# Altium PCB АСТА.758723.034_V1.PcbDoc
Units mm, origin at the board's own origin, x right, y up, seen from the top; angles counter-clockwise.
Board outline 70 x 50 mm, 2 copper layers (Top Layer, Bottom Layer), stack 1.48 mm thick; 19 components, 12 nets, 79 pads, 14 vias.
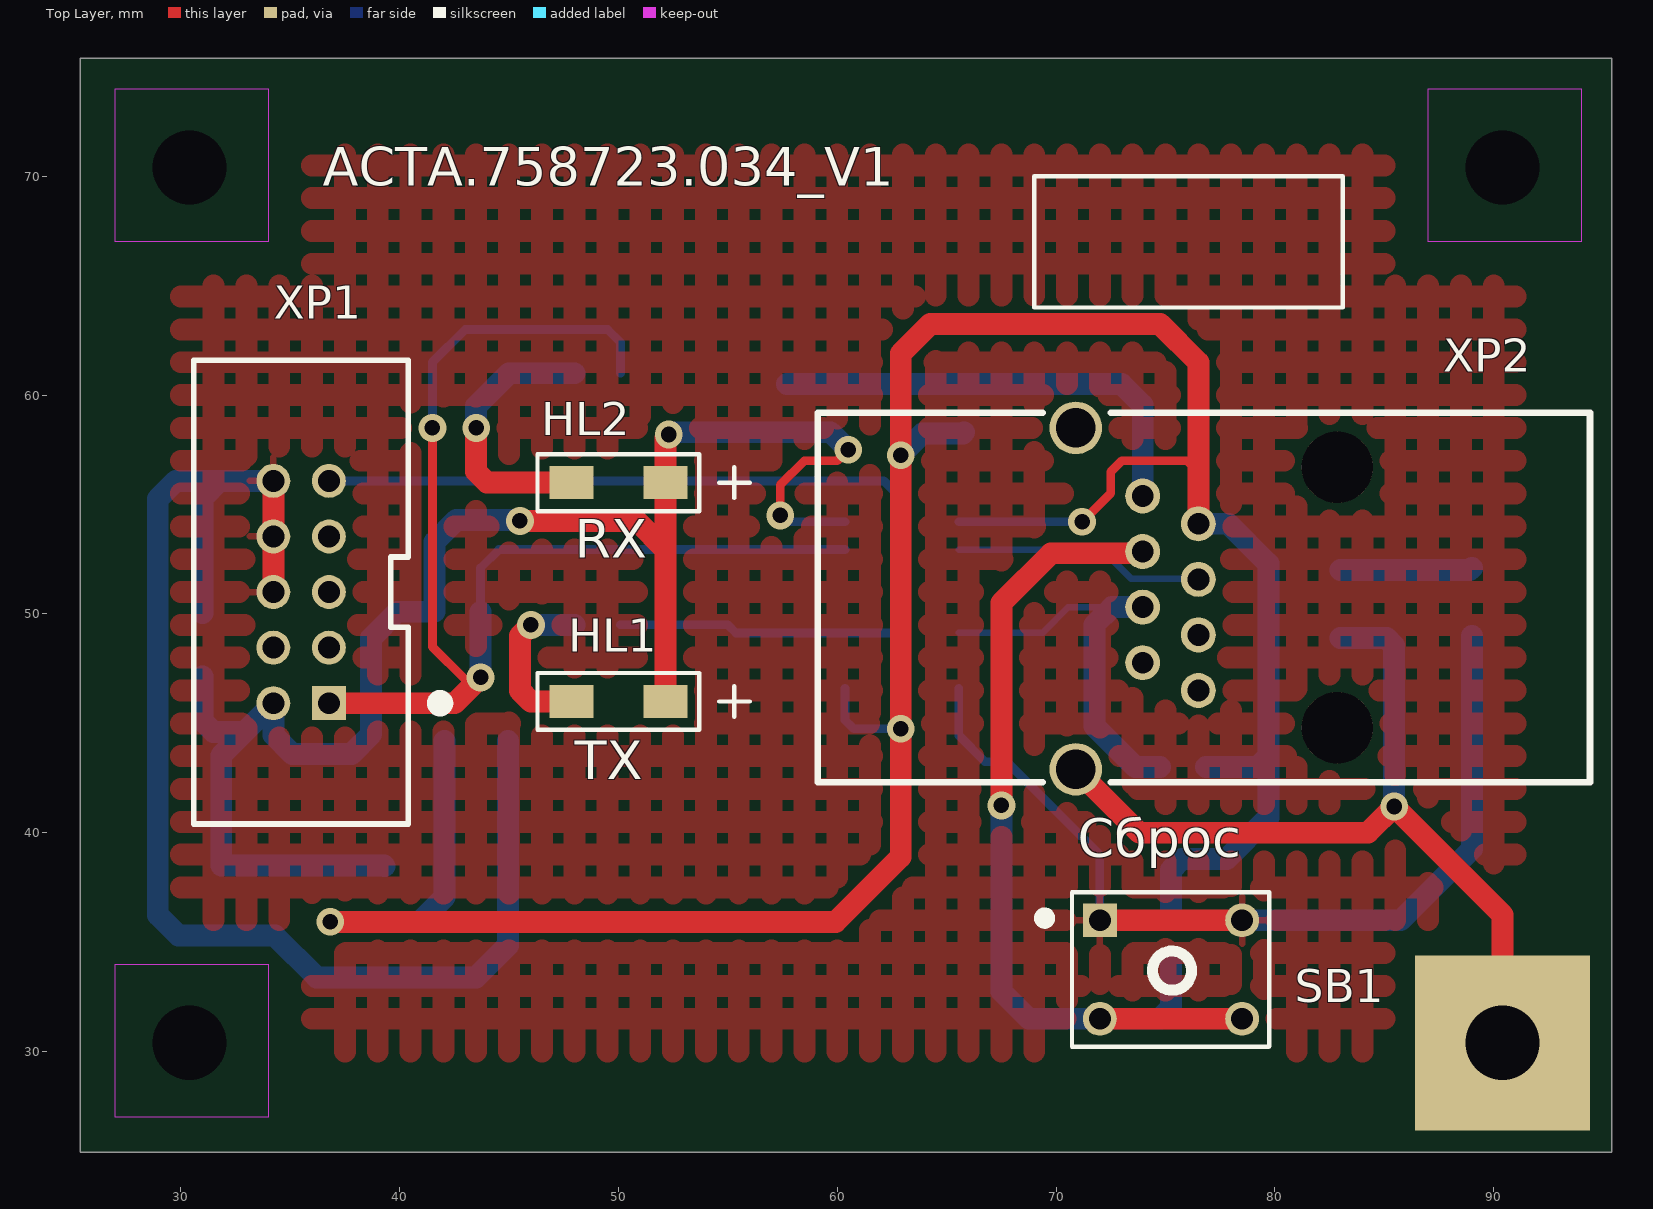
[diagram p0: Top Layer view]
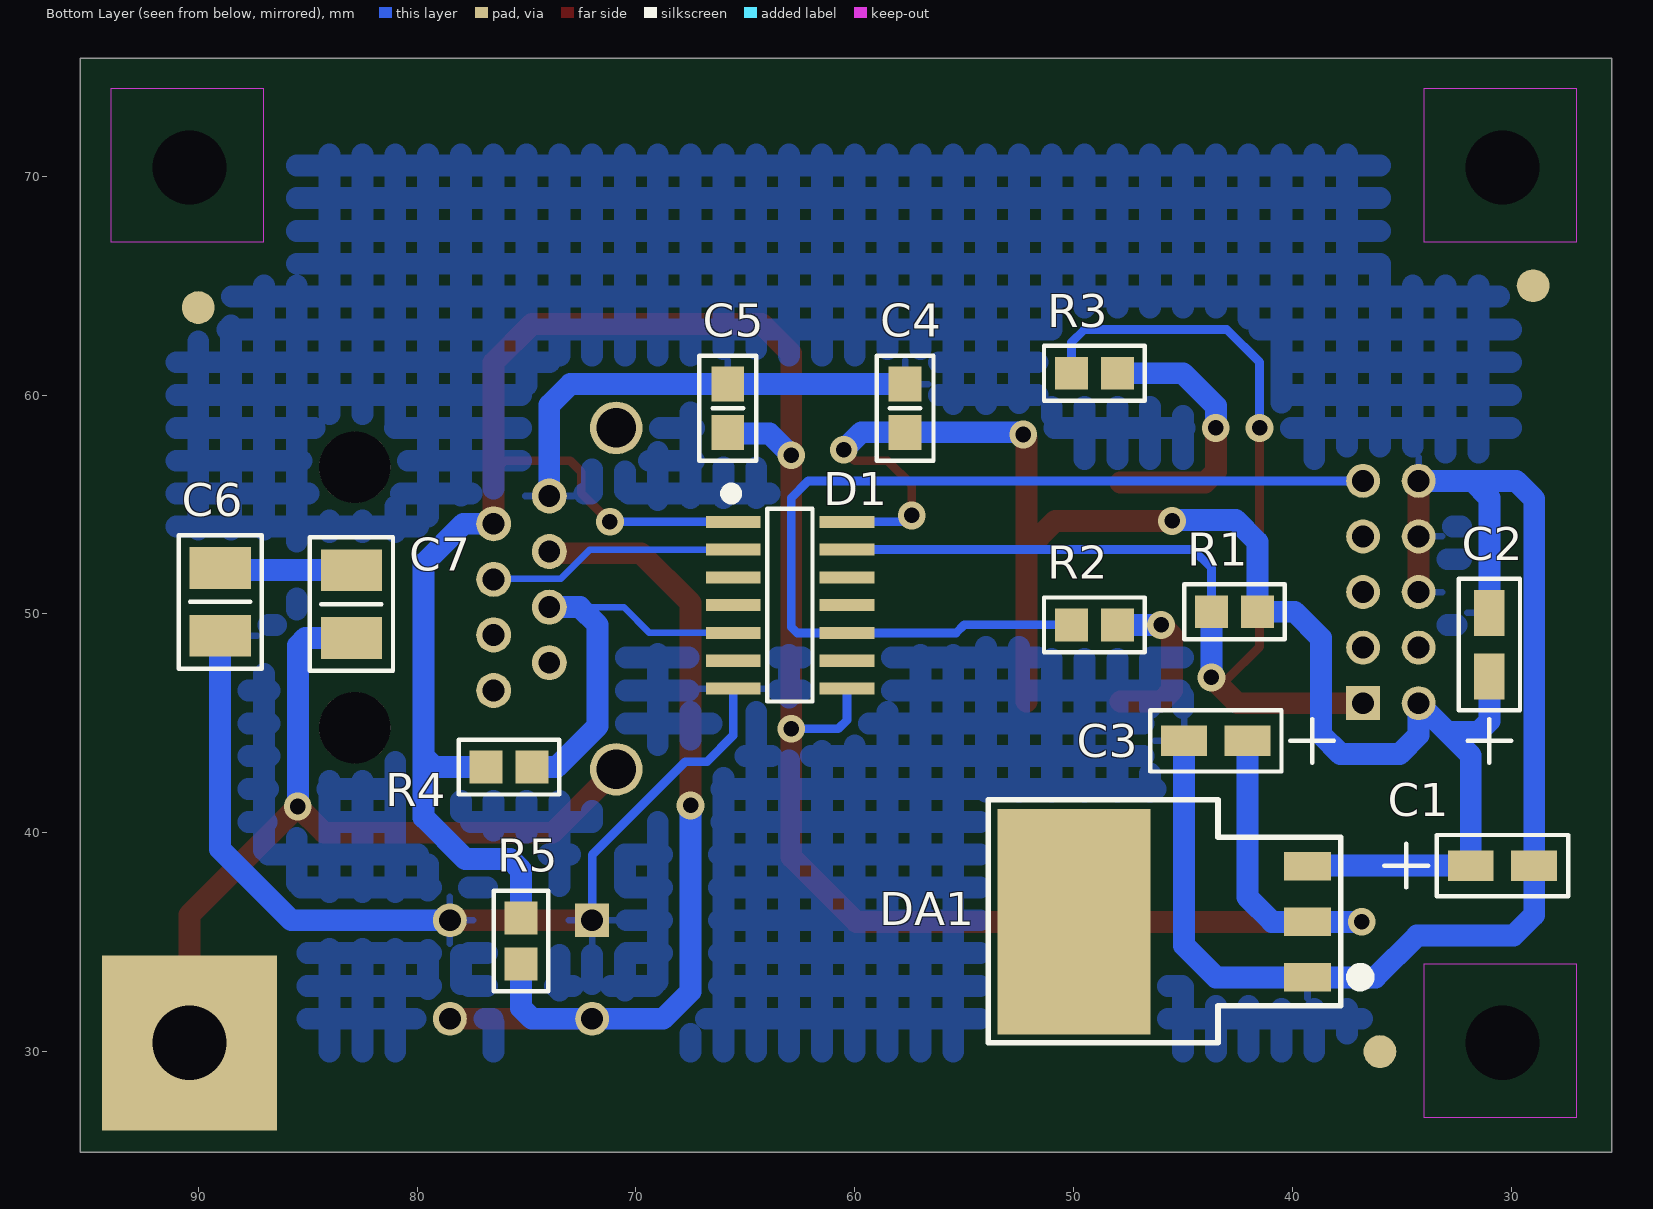
[diagram p1: Bottom Layer view, seen from below]

## Layer stack, top to bottom
Top Layer: signal copper 0.018
Dielectric: core 1.444, FR-4, Dk 4.8
Bottom Layer: signal copper 0.018

## Board outline
25.4,25.4 95.4,25.4 95.4,75.4 25.4,75.4

## Design rules (kind name [scope] priority, off if disabled: settings)
Clearance [All] p1: gap=0.3
HoleSize [All] p1: absolutevalues=TRUE maxlimit=3.4 minlimit=0.5 maxpercent=80.000 minpercent=20.000
PasteMaskExpansion [All] p1: expansion=0.075
PlaneConnect [All] p1: planeconnectstyle=Relief reliefexpansion=0.508 reliefentries=4 reliefconductorwidth=0.4 reliefairgap=0.254
PolygonConnect [All] p1: connectstyle=Relief reliefconductorwidth=0.3 reliefentries=4 polygonreliefangle="90 Angle" airgapwidth=0.3
RoutingVias [All] p1: holewidth=0.5 width=1.1 viastyle="Through Hole" minholewidth=0.5 minwidth=1.1 maxholewidth=0.5 maxwidth=1.1
SilkToSolderMaskClearance [IsPad] p1: minsilkscreentomaskgap=0.2 clearancetoexposedcopper=TRUE
SolderMaskExpansion [All] p1: expansion=0.102
Width [All] p1: maxlimit=1 minlimit=0.2 preferedwidth=0.3
24 further rules are at their usual default settings.

## Components (designator, comment, footprint, x,y, rotation, side; value= is the part's Value field where it differs from the comment)
C1 "10uF" TANTAL_A 29,38.5 r180 bottom
C2 "10uF" TANTAL_A 31,50 r90 bottom
C3 "10uF" TANTAL_A 44.9,44.2 r0 bottom
C4 "0.1uF" CAP_0805 57.7,58.3 r270 bottom
C5 "0.1uF" CAP_0805 65.8,60.5 r90 bottom
C6 "220pF" CAP_1210 89,49 r270 bottom
C7 "220pF" CAP_1210 83,52 r90 bottom
D1 "TXS0104EDR" SOIC(D)_014 63,50.4 r180 bottom
DA1 "LM1086ISX-3.3" TO-263 50,36 r180 bottom
HL1 "AP3216SYC" 1206 48,46 r0 top
HL2 "AP3216SGC" 1206 48,56 r0 top
R1 "10K" RES_0805 43.6,50.1 r0 bottom
R2 "1K" RES_0805 50,49.5 r0 bottom
R3 "1K" RES_0805 50,61 r0 bottom
R4 "10K" RES_0805 76.75,43 r0 bottom
R5 "10K" RES_0805 75.25,36 r90 bottom
SB1 "06_43" DIP_SWICH_0643 72,36 r0 top
XP1 "BH-10G" BH-10G 35.5,51 r270 top
XP2 "XP1002000-04R" XP1002000-04R 76.5,46.5 r180 top

## Footprints (in the part's own frame and the unit in brackets; to place one, negate y for a bottom-side part, rotate by r counter-clockwise, add the part's x,y. Pads: shape width x height; smd on the part's side, far side on the other; paste and mask are expansions set on the pad)
1206 [mm]
  rect 2x1.5 smd: 1(-0.15,0) 2(4.15,0)
  silkscreen extent -1.7,-1.3 8,1.3
BH-10G [mm]
  rect 1.55x1.55 hole 1: 1(5.08,1.27)
  round 1.55 hole 1: 2(5.08,-1.27) 3(2.54,1.27) 4(2.54,-1.27) 5(0,1.27) 6(0,-1.27) 7(-2.54,1.27) 8(-2.54,-1.27) 9(-5.08,1.27) 10(-5.08,-1.27)
  silkscreen extent -10.6,-4.9 10.6,6.6
CAP_0805 [mm] "Chip Resistor, Body 2.0x1.2mm, IPC Low Density"
  rect 1.6x1.5 smd: 1(0,0) 2(-2.2,0)
  silkscreen extent -3.5,-1.3 1.3,1.3
CAP_1210 [mm] "Chip Capacitor, Body 3.2x2.5mm, IPC High Density"
  rect 1.9x2.8 smd: 1(0,0) 2(-3.1,0)
  silkscreen extent -4.6,-1.9 1.5,1.9
DIP_SWICH_0643 [mm]
  rect 1.55x1.55 hole 1: 1(0,0)
  round 1.55 hole 1: 2(0,-4.5) 3(6.5,0) 4(6.5,-4.5)
  silkscreen extent -2.76,-5.77 7.75,1.28
RES_0805 [mm] "Chip Resistor, Body 2.0x1.2mm, IPC Low Density"
  rect 1.5x1.5 smd: 1(0.1,0) 2(-2,0)
  silkscreen extent -3.25,-1.25 1.35,1.25
SOIC(D)_014 [mm]
  rect 2.5x0.55 smd: 1(-2.55,3.81) 2(-2.55,2.54) 3(-2.55,1.27) 4(-2.55,0) 5(-2.55,-1.27) 6(-2.55,-2.54) 7(-2.55,-3.81) 8(2.65,-3.81) 9(2.65,-2.54) 10(2.65,-1.27) 11(2.65,0) 12(2.65,1.27) 13(2.65,2.54) 14(2.65,3.81)
  silkscreen extent -2.9,-4.4 1.07,5.35
TANTAL_A [mm]
  rect 2.1x1.4 smd: 1(-2.85,0) 2(0.05,0)
  silkscreen extent -6.8,-1.4 1.6,1.4
TO-263 [mm]
  rect 2.16x1.3 smd: 1(10.69,-2.61) 2(10.69,-0.07) 3(10.69,2.47)
  rect 7x10.3 smd: 4(0.02,-0.07)
  silkscreen extent -3.9,-5.6 13.4,5.5
XP1002000-04R [mm]
  round 1.6 hole 1: 1(2.54,-8.89) 2(0,-7.62) 3(2.54,-6.35) 4(0,-5.08) 5(2.54,-3.81) 6(0,-2.54) 7(2.54,-1.27) 8(0,0)
  round 2.4 hole 1.8: 9(5.6,-12) 10(5.6,3.6)
  round 3.25 hole 3.25 unplated: 11(-6.35,1.7) 12(-6.35,-10.2)
  silkscreen extent -17.9,-12.7 17.4,4.2

## Part data
C1 C2 C3: library part TANTAL_A
C4 C5: library part CAP-0805
C6 C7: library part CAP-1210
D1: "Bidirectional Voltage level; 4-bit"
DA1: library part LM1086, "to + 3.3  1.5A"
HL1 HL2: library part AP3216(1206), "Светодиод планарный 1206"
R1 R2 R3 R4 R5: library part RES-0805
XP2: "Serial to Ethernet Port"

## Free pads (board coordinates)
  round 0 hole 3.4 unplated: 1(30.4,30.4) 3(90.4,70.4) 4(30.4,70.4)
  round 1.5 smd far side mask+1: 1(90,64) 2(36,30) 3(29,65)
  rect 8x8 hole 3.4: 2(90.4,30.4)

## Via types
v1: diameter 1.27, hole 0.711, Top Layer to Bottom Layer, 14 vias

## Nets (pads, with @x,y where several pads share a name; then routed paths per layer and width w, separated by ;. In a path a pad name is that pad's centre, name@x,y a point inside that pad or via, vN(x,y) a via of type N, cw(c..) or ccw(c..) an arc to the next point about the centre after c; other vN are vias at no path point)
+3.3V: C3.1 C5.2 D1.1 D1.8 DA1.2 R4.1 R5.1 XP2.2 | length 132.1
  Top Layer w0.4: v1(71.19,54.21) 72.5,55.52 72.5,56.5 73,57 76,57 76.5,56.5
  Top Layer w1: v1@36.9,36 v1(36.83,35.93) 59.93,35.93 62.9,38.9 v1(62.9,44.75) v1(62.9,57.25) 62.9,61.9 64.25,63.25 74.75,63.25 76.5,61.5 76.5,56.5 XP2.2
  Bottom Layer w0.4: D1.8 60.35,45.15 60.75,44.75 v1(62.9,44.75) ; D1.1 v1(71.19,54.21)
  Bottom Layer w1: v1(36.83,35.93) DA1.2 40.93,35.93 42.05,37.05 C3.1 ; v1(62.9,57.25) 63.9,58.25 65.75,58.25 C5.2 ; R5.1 75.25,38.3 75.75,38.8 77.8,38.8 79.7,40.7 79.7,43.5 ; XP2.2 77.88,54.12 79.7,52.3 79.7,43.5 ; R4.1 79.2,43 79.7,43.5
+5V: C1.1 C2.1 C4.1 D1.14 DA1.3 HL1.2 HL2.2 R1.2 XP1.2 | length 78.2
  Top Layer w0.4: v1(57.4,54.5) 57.4,55.9 58.5,57 60,57 v1(60.5,57.5)
  Top Layer w1: v1(45.5,54.25) 50.84,54.25 52.15,52.94 ; HL1.2 52.15,52.94 ; v1(52.3,58.2) 52.15,58.05 HL2.2 52.15,52.94
  Bottom Layer w0.4: v1(57.4,54.5) 57.69,54.21 D1.14
  Bottom Layer w1: C2.1 31,45.1 31.5,44.6 32.91,44.6 ; DA1.3 39.28,38.5 C1.1 31.85,43.54 32.91,44.6 ; v1@45.5,54.3 42.6,54.3 41.6,53.3 R1.2 39.9,50.1 38.7,48.9 38.7,44.5 37.8,43.6 35.1,43.6 34.23,44.47 XP1.2 32.91,44.6 ; v1@52.4,58.2 52.5,58.3 C4.1 59.7,58.3 v1(60.5,57.5)
EARTH: C7.2 pad.2@90.4,30.4 XP2.10 | length 39
  Top Layer w1: XP2.10 73.8,40 84.25,40 v1(85.45,41.2) 90.4,36.25 pad.2@90.4,30.4
  Bottom Layer w1: C7.2 85.1,48.9 85.45,48.55 v1(85.45,41.2)
GND: C1.2 C2.2 C3.2 C4.2 C5.1 C6.1 D1.7 DA1.1 SB1.1 SB1.3 XP1.6 XP1.8 XP1.10 XP2.1 | length 125.9
  Top Layer w1: XP1.6 XP1.8 XP1.10 ; SB1.1 SB1.3
  Bottom Layer w0.4: D1.7 65.55,44.45 66.75,43.25 67.75,43.25 72,39 SB1.1
  Bottom Layer w1: C2.2 31,55.3 31.78,56.08 ; XP1.10 31.78,56.08 ; C3.2 44.95,34.85 43.49,33.39 DA1.1 36.21,33.39 34.3,35.3 29.9,35.3 28.95,36.25 C1.2 28.95,55.25 29.78,56.08 31.78,56.08 ; C4.2 C5.1 73,60.5 73.96,59.54 XP2.1 ; SB1.3 85.75,36 89,39.25 C6.1
NetC6_2: C6.2 C7.1 | length 6
  Bottom Layer w1: C7.1 88.9,52 C6.2
NetD1_2: D1.2 XP2.4 | length 11.5
  Bottom Layer w0.3: D1.2 72.102,52.94 73.442,51.6 76.48,51.6 XP2.4
NetD1_5: D1.5 R4.2 XP2.5 | length 17.9
  Bottom Layer w0.3: D1.5 69.38,49.13 70.56,50.31 72.06,50.31
  Bottom Layer w1: XP2.5 72.56,50.31 71.75,49.5 71.75,44.878 73.628,43 R4.2
NetD1_10: D1.10 R2.1 XP1.9 | length 45.4
  Bottom Layer w0.4: XP1.9 62.12,56.08 62.9,55.3 62.9,49.4 62.63,49.13 D1.10 55.37,49.13 55,49.5 R2.1
NetD1_13: D1.13 R1.1 R3.1 XP1.1 | length 55.9
  Top Layer w0.4: v1(41.5,58.5) 41.5,48.5 43,47 v1@43.6,47
  Top Layer w1: XP1.1 42.52,45.92 v1@43.6,47
  Bottom Layer w0.4: v1(41.5,58.5) 41.5,61.5 43,63 49.5,63 50.1,62.4 R3.1 ; R1.1 43.7,52.1 44.54,52.94 D1.13
  Bottom Layer w1: v1(43.7,47.1) R1.1
NetHL1_1: HL1.1 R2.2 | length 7.8
  Top Layer w1: v1(46,49.5) 45.5,49 45.5,46.5 46,46 HL1.1
  Bottom Layer w1: v1(46,49.5) R2.2
NetHL2_1: HL2.1 R3.2 | length 12.7
  Top Layer w1: v1(43.5,58.5) 43.5,56.5 44,56 HL2.1
  Bottom Layer w1: v1(43.5,58.5) 43.5,59.5 45,61 R3.2
RESET: R5.2 SB1.2 SB1.4 XP2.3 | length 42.2
  Top Layer w1: v1(67.5,41.25) 67.5,50.5 69.775,52.775 73.885,52.775 XP2.3 ; SB1.2 SB1.4
  Bottom Layer w1: v1(67.5,41.25) 67.5,32.75 68.75,31.5 SB1.2 74.75,31.5 75.25,32 R5.2
pads on no net: D1.3 D1.4 D1.6 D1.9 D1.11 D1.12 DA1.4 XP1.3 XP1.4 XP1.5 XP1.7 XP2.6 XP2.7 XP2.8 XP2.9 XP2.11 XP2.12

## Polygon pours and split planes (outlines as drawn)
GND on Top Layer "Top Layer-No Net" (hatched 90Degree grid 1.5 track 1, remove dead copper, pour order 2): 36,71 85,71 85,65 91,65 91,36 85,36 85,30 36,30 36,36 30,36 30,65 36,65 36,71
GND on Bottom Layer "Top Layer-No Net" (hatched 90Degree grid 1.5 track 1, remove dead copper, pour order 4): 36,30 85,30 85,36 91,36 91,65 85.5,65 85.5,70.5 85,71 36,71 36,66 36,65 30,65 30,36 36,36 36,30
no net on Top Paste "Top Layer-No Net" (solid, remove dead copper): 86.4,26.4 86.4,34.4 94.4,34.4 94.4,26.4 86.4,26.4
no net on Bottom Paste "Top Layer-No Net" (solid, remove dead copper): 86.4,26.4 86.4,34.4 94.4,34.4 94.4,26.4 86.4,26.4

## Keep-outs
Keep-Out Layer:
  region: 94,67 87,67 87,74 94,74
  region: 34,27 27,27 27,34 34,34
  region: 34,67 27,67 27,74 34,74

## Silkscreen, mask and mechanical layers (free items; w line width, h text height)
Top Overlay:
  lines w0.2: 69,64 83.1,64 83.1,70 69,70 69,64
  text "АСТА.758723.034_V1" at 36.5,69 h3
  text "RX" at 48,52 h3
  text "TX" at 48,41.88 h3
  text "Сброс" at 71,38.3 h3
Board:
  lines w0.2: 25.4,30.4 25.4,41.051 ; 25.4,25.4 25.4,75.4 95.4,75.4 95.4,25.4 25.4,25.4
Drill Drawing:
  circle w0.025: c102.365,45.828 r0.635
  lines w0.025: 101.73,29.953 103,29.953 103,31.223 101.73,31.223 101.73,29.953 ; 101.73,33.763 102.365,34.081 103,33.763 102.683,34.398 103,35.033 102.365,34.716 101.73,35.033 102.048,34.398 101.73,33.763 ; 101.73,37.891 102.048,37.891 102.365,37.573 102.683,37.891 103,37.891 102.683,38.208 103,38.526 102.683,38.526 102.365,38.843 102.048,38.526 101.73,38.526 102.048,38.208 101.73,37.891 ; 101.73,42.653 103,42.653 102.365,41.383 101.73,42.653 ; 101.73,49.321 102.048,49.321 102.048,49.003 102.683,49.003 102.683,49.321 103,49.321 103,49.956 102.683,49.956 102.683,50.273 102.048,50.273 102.048,49.956 101.73,49.956 101.73,49.321
  lines w0.381: 100,28.81 198.526,28.81 ; 100,51.67 198.526,51.67 ; 113.992,25 113.992,55.48 ; 131.717,25 131.717,55.48 ; 165.895,25 165.895,55.48 ; 178.744,25 178.744,55.48 ; 100,25 198.526,25 198.526,55.48 100,55.48 100,25
  text "Symbol" at 102.286,52.813 h1.83
  text "Hit Count" at 115.135,52.813 h1.83
  text "Finished Hole Size" at 132.86,52.813 h1.83
  text "Plated" at 167.038,52.813 h1.83
  text "Hole Type" at 179.887,52.813 h1.83
  text "1" at 115.135,49.003 h1.52
  text "3,400mm" at 132.86,49.003 h1.52
  text "PTH" at 167.038,49.003 h1.52
  text "Round" at 179.887,49.003 h1.52
  text "2" at 115.135,45.193 h1.52
  text "1,800mm" at 132.86,45.193 h1.52
  text "PTH" at 167.038,45.193 h1.52
  text "Round" at 179.887,45.193 h1.52
  text "2" at 115.135,41.383 h1.52
  text "3,250mm" at 132.86,41.383 h1.52
  text "NPTH" at 167.038,41.383 h1.52
  text "Round" at 179.887,41.383 h1.52
  text "3" at 115.135,37.573 h1.52
  text "3,400mm" at 132.86,37.573 h1.52
  text "NPTH" at 167.038,37.573 h1.52
  text "Round" at 179.887,37.573 h1.52
  text "14" at 115.135,33.763 h1.52
  text "0,711mm" at 132.86,33.763 h1.52
  text "PTH" at 167.038,33.763 h1.52
  text "Round" at 179.887,33.763 h1.52
  text "22" at 115.135,29.953 h1.52
  text "1,000mm" at 132.86,29.953 h1.52
  text "PTH" at 167.038,29.953 h1.52
  text "Round" at 179.887,29.953 h1.52
  text "44 Total" at 115.135,26.143 h1.52
Graf. SAPR:
  circle w0.2: c30.4,70.4 r1.7
  circle w0.2: c30.4,30.4 r1.7
  circle w0.2: c90.4,70.4 r1.7
  circle w0.2: c90.4,30.4 r1.7
  lines w0.2: 26.7,30.4 30.4,30.4 ; 26.7,70.4 30.4,70.4 ; 30.4,26.7 30.4,30.4 ; 30.4,34.1 30.4,30.4 ; 30.4,66.7 30.4,70.4 ; 30.4,74.1 30.4,70.4 ; 34.1,30.4 30.4,30.4 ; 34.1,70.4 30.4,70.4 ; 86.7,30.4 90.4,30.4 ; 86.7,70.4 90.4,70.4 ; 90.4,26.7 90.4,30.4 ; 90.4,34.1 90.4,30.4 ; 90.4,66.7 90.4,70.4 ; 90.4,74.1 90.4,70.4 ; 94.1,30.4 90.4,30.4 ; 94.1,70.4 90.4,70.4

## Dimensions
90.4,30.4 to 95.4,25.4 on Dim
90.4,30.4 to 95.4,25.4 on Dim
25.4,75.4 to 95.4,75.4 on Dim
25.4,25.4 to 25.4,75.4 on Dim